# Altium PCB 1RGB-LED-Board_CR12xx_TestPanel.PcbDoc
Units mm, origin at the board's own origin, x right, y up, seen from the top; angles counter-clockwise.
Board outline 54 x 127 mm, 2 copper layers (Top Layer, Bottom Layer), stack 1.62 mm thick; 4 components, 0 nets, 4 pads, 0 vias.
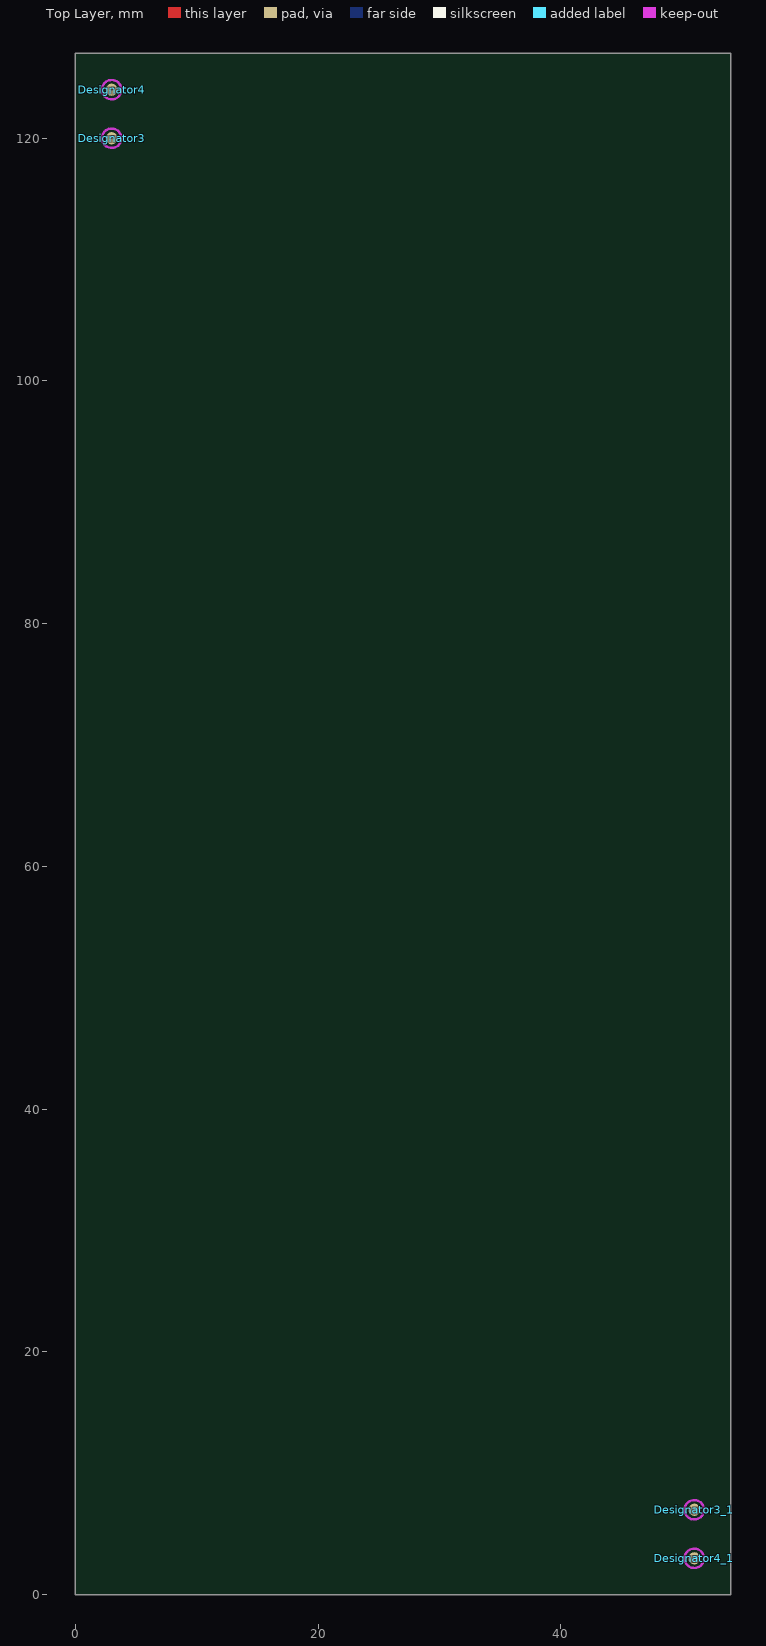
[diagram p0: Top Layer view]
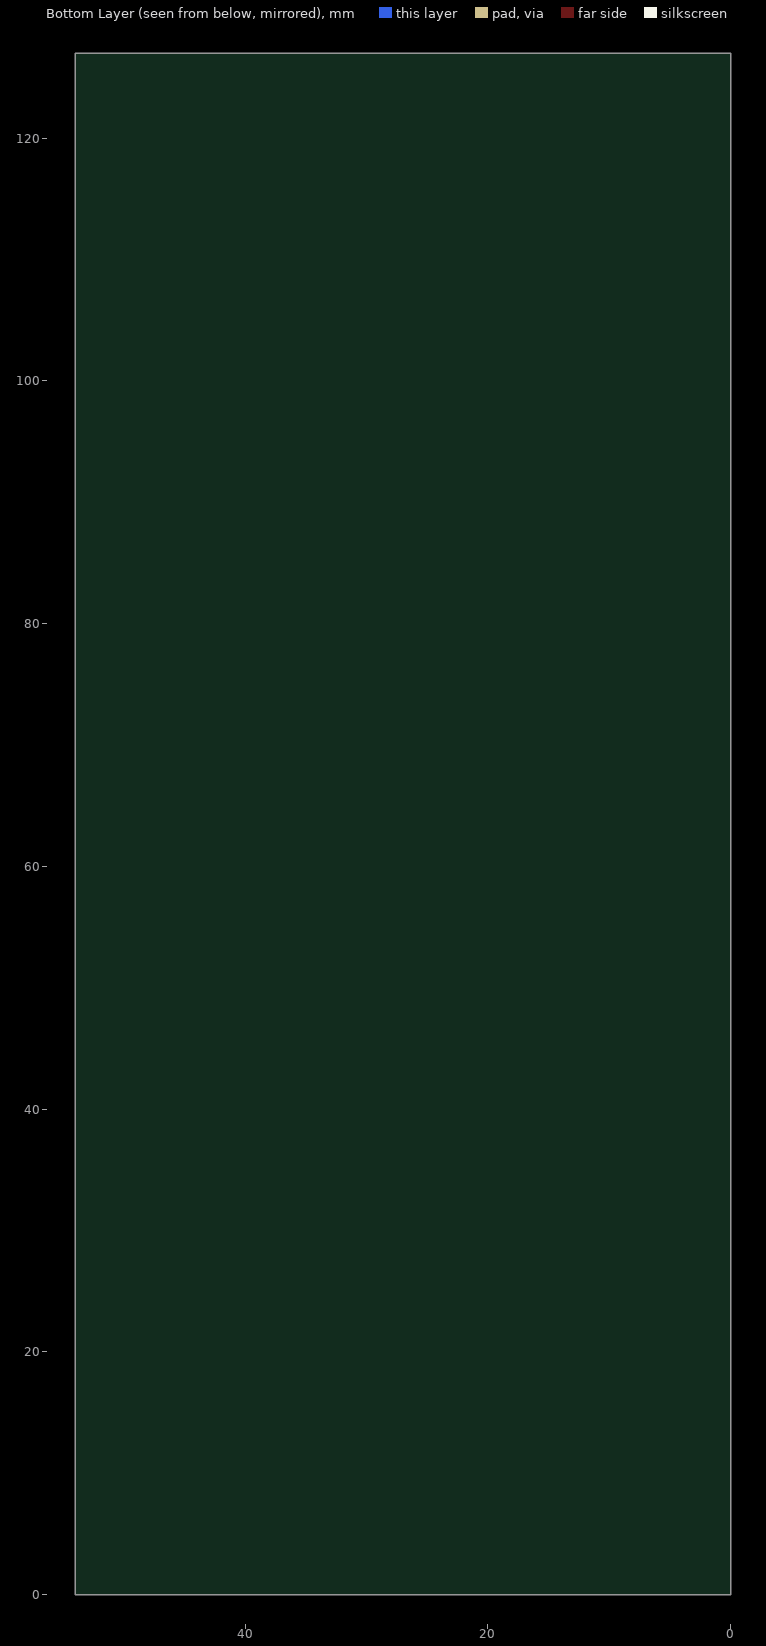
[diagram p1: Bottom Layer view, seen from below]

## Layer stack, top to bottom
Top Solder: solder mask 0.0102, Solder Resist, Dk 3.5
Top Layer: signal copper 0.035
Dielectric1: core 1.55, FR-4, Dk 4.8
Bottom Layer: signal copper 0.035
Bottom Solder: solder mask 0.0102, Solder Resist, Dk 3.5

## Board outline
0,0 54,0 54,127 0,127

## Design rules (kind name [scope] priority, off if disabled: settings)
BoardOutlineClearance [All] p1: gap=0.25 ignorepadtopadclearanceinfootprint=FALSE except(0: Arc-SplitContinuation Track-SplitContinuation SMDPad-SplitContinuation THPad-SplitContinuation Via-SplitContinuation Fill-SplitContinuation Poly-SplitContinuation Region-SplitContinuation Text-SplitContinuation)
Clearance "PCB Rand - Via" [OnLayer('Board Outline') or OnLayer('Keep-Out Layer') vs IsVia] p1: gap=0.5 ignorepadtopadclearanceinfootprint=FALSE except(0: Arc-Hole Track-Hole SMDPad-Hole THPad-Hole Via-Hole Fill-Hole Poly-Hole Region-Hole Text-Hole)
Clearance "GND-Poly zu Keepout und Rand" [InNet('GND') and InPolygon vs OnLayer('Keep-Out Layer') or OnLayer('Board Outline')] p2: gap=0.25 ignorepadtopadclearanceinfootprint=FALSE except(0: Arc-Hole Track-Hole SMDPad-Hole THPad-Hole Via-Hole Fill-Hole Poly-Hole Region-Hole Text-Hole)
Clearance "PCB Rand" [All vs OnLayer('Board Outline') or OnLayer('Keep-Out Layer')] p3: gap=0.5 ignorepadtopadclearanceinfootprint=FALSE except(0: Arc-Hole Track-Hole SMDPad-Hole THPad-Hole Via-Hole Fill-Hole Poly-Hole Region-Hole Text-Hole)
Clearance [All] p4: gap=0.15 ignorepadtopadclearanceinfootprint=FALSE except(0: Arc-Hole Track-Hole SMDPad-Hole THPad-Hole Via-Hole Fill-Hole Poly-Hole Region-Hole Text-Hole)
ComponentClearance [All and not (HasFootprint('CON-01-PAD-1MM-0.5MM')) vs All and not (HasFootprint('CON-01-PAD-1MM-0.5MM'))] p1: gap=0.25 collisioncheckmode=3 verticalgap=0.25 showdistances=TRUE
DiffPairsRouting [All] p1: maxlimit=0.25 minlimit=0.15 mostfreqgap=0.15 toplayer_minwidth=0.381 toplayer_maxwidth=0.381 toplayer_prefwidth=0.381 bottomlayer_minwidth=0.381 bottomlayer_maxwidth=0.381 bottomlayer_prefwidth=0.381 maxuncoupledlength=15
FabricationTestPointUsage TestPointUsage [All] p1: valid=0 allowmultiple=FALSE
FabricationTestpoint Testpoint [All] p1: side=3 testpointundercomponent=TRUE minsize=1.016 maxsize=2.54 preferedsize=1.524 minholesize=0 maxholesize=1.016 preferedholesize=0.813 testpointgrid=0.025 allowsidetop=TRUE allowsidebottom=TRUE usegrid=TRUE gridtolerance=0
HoleSize "HS: 0,3" [All] p1 off: absolutevalues=TRUE maxlimit=6 minlimit=0.3 maxpercent=80.000 minpercent=20.000
HoleSize "HS: 0,2" [All] p2: absolutevalues=TRUE maxlimit=6 minlimit=0.2 maxpercent=80.000 minpercent=20.000
HoleSize "HS: 0,1" [All] p3 off: absolutevalues=TRUE maxlimit=6 minlimit=0.1 maxpercent=80.000 minpercent=20.000
HoleToHoleClearance [All] p1: gap=0.2 allowstackedmicrovias=TRUE
MinimumAnnularRing "MAR: 100µ" [All] p1 off: minimumring=0.1
MinimumAnnularRing "MAR: 150µ" [All] p2: minimumring=0.15
MinimumSolderMaskSliver [All] p1: minsoldermaskwidth=0.025
PolygonConnect "Small Parts" [All vs isBGA or HasFootprint('AS1369') or HasFootprint('1005*') or InComponentClass('Thermal Connect')] p1: connectstyle=Relief reliefconductorwidth=0.25 reliefentries=4 polygonreliefangle="90 Angle" airgapwidth=0.15
PolygonConnect [All] p2: connectstyle=Direct reliefconductorwidth=0.254 reliefentries=4 polygonreliefangle="90 Angle" airgapwidth=0.254
RoutingVias "RV: 0,1 150µ OAR" [All] p1 off: holewidth=0.711 width=1.27 viastyle="Through Hole" minholewidth=0.711 minwidth=1.27 maxholewidth=0.711 maxwidth=1.27 useviatemplates=TRUE viatemplateguid#1={FCEEF90D-C03C-4A2C-A69C-B6B45F7ED47F} viatemplateguid#2={A1A84B09-15C8-4774-97AF-A07E4E00FAEA} viatemplateguid#3={8D78D813-7AC7-4525-900E-9616BB5F5C14} viatemplatename#1=v40h10m15 viatemplatename#2=v50h20m25 viatemplatename#3=v60h30m35
RoutingVias "RV: 0,2 100µ OAR" [All] p2 off: holewidth=0.711 width=1.27 viastyle="Through Hole" minholewidth=0.711 minwidth=1.27 maxholewidth=0.711 maxwidth=1.27 useviatemplates=TRUE viatemplateguid#1={120964C1-E41D-43FF-9284-10A807E30730} viatemplateguid#2={A1A84B09-15C8-4774-97AF-A07E4E00FAEA} viatemplateguid#3={8D78D813-7AC7-4525-900E-9616BB5F5C14} viatemplatename#1=v40h20m25 viatemplatename#2=v50h20m25 viatemplatename#3=v60h30m35
RoutingVias "RV: 0,2 150µ OAR" [All] p3: holewidth=0.711 width=1.27 viastyle="Through Hole" minholewidth=0.711 minwidth=1.27 maxholewidth=0.711 maxwidth=1.27 useviatemplates=TRUE viatemplateguid#1={A1A84B09-15C8-4774-97AF-A07E4E00FAEA} viatemplateguid#2={8D78D813-7AC7-4525-900E-9616BB5F5C14} viatemplatename#1=v50h20m25 viatemplatename#2=v60h30m35
RoutingVias "RV: 0,3 150µ OAR" [All] p4 off: holewidth=0.711 width=1.27 viastyle="Through Hole" minholewidth=0.711 minwidth=1.27 maxholewidth=0.711 maxwidth=1.27 useviatemplates=TRUE viatemplateguid#1={8D78D813-7AC7-4525-900E-9616BB5F5C14} viatemplatename#1=v60h30m35
SilkToSilkClearance [All] p1: silktosilkclearance=0
SilkToSolderMaskClearance SilkscreenOverComponentPads [IsPad] p1: minsilkscreentomaskgap=0 clearancetoexposedcopper=TRUE
SolderMaskExpansion "GND Pads" [IsPad and InNet('GND') and Not ((Name Like '*-TP') Or HasFootprint('AS1369'))] p1: expansion=0
SolderMaskExpansion [All] p2: expansion=0.075
Width [All] p1: maxlimit=0.5 minlimit=0.15 preferedwidth=0.2
21 further rules are at their usual default settings.

## Components (designator, comment, footprint, x,y, rotation, side; value= is the part's Value field where it differs from the comment)
Designator3 "Comment" FID-1MM-0.5MM-PASTE 3,120 r0 top
Designator3_1 "Comment" FID-1MM-0.5MM-PASTE 51,7 r180 top
Designator4 "Comment" FID-1MM-0.5MM 3,124 r0 top
Designator4_1 "Comment" FID-1MM-0.5MM 51,3 r180 top

## Footprints (in the part's own frame and the unit in brackets; to place one, negate y for a bottom-side part, rotate by r counter-clockwise, add the part's x,y. Pads: shape width x height; smd on the part's side, far side on the other; paste and mask are expansions set on the pad)
FID-1MM-0.5MM [mm] "1mm fiducial with 0.5mm clearance"
  round 1 smd paste-1: NC(0,0)
  Top Layer keep-out circle w0.2: c0,0 r0.8
FID-1MM-0.5MM-PASTE [mm] "1mm fiducial with 0.5mm clearance"
  round 1 smd paste+0.1: NC(0,0)
  Top Layer keep-out circle w0.2: c0,0 r0.8

## Part data
Designator3 Designator3_1: library part FID-1MM-0.5MM-CIRCLE-PASTE
Designator4 Designator4_1: library part FID-1MM-0.5MM

## Nets (pads, with @x,y where several pads share a name; then routed paths per layer and width w, separated by ;. In a path a pad name is that pad's centre, name@x,y a point inside that pad or via, vN(x,y) a via of type N, cw(c..) or ccw(c..) an arc to the next point about the centre after c; other vN are vias at no path point)
pads on no net: Designator3.NC Designator3_1.NC Designator4.NC Designator4_1.NC

## Silkscreen, mask and mechanical layers (free items; w line width, h text height)
Board Outline (2.0mm milling):
  the board outline again, w0.05

## Panel: embedded boards
"..\PCB_Main\1RGB-LED-Board_CR12xx.PcbDoc" at 48.4,55.509, 2 rows x 3 columns, spacing 22.4 x 22.4, rotation 90
"1RGB-LED-Board_CR12xx-TESTBOARD.PcbDoc" at 7,6.759, 2 rows x 2 columns, spacing 24.4 x 21.4, rotation 0